# Altium PCB FFC_ToHDR_Pcb.PcbDoc
Units mil, origin at the board's own origin, x right, y up, seen from the top; angles counter-clockwise.
Board outline 555 x 1000 mil, 2 copper layers (Top Layer, Bottom Layer); 5 components, 12 nets, 34 pads, 4 vias.
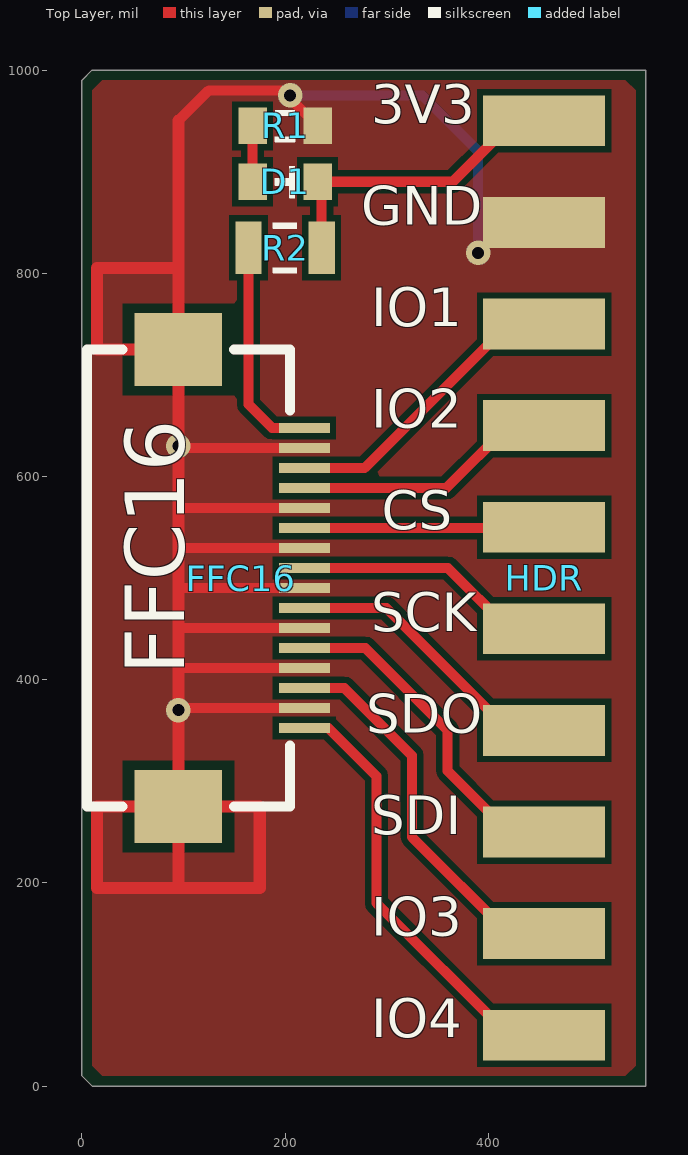
[diagram p0: Top Layer view]
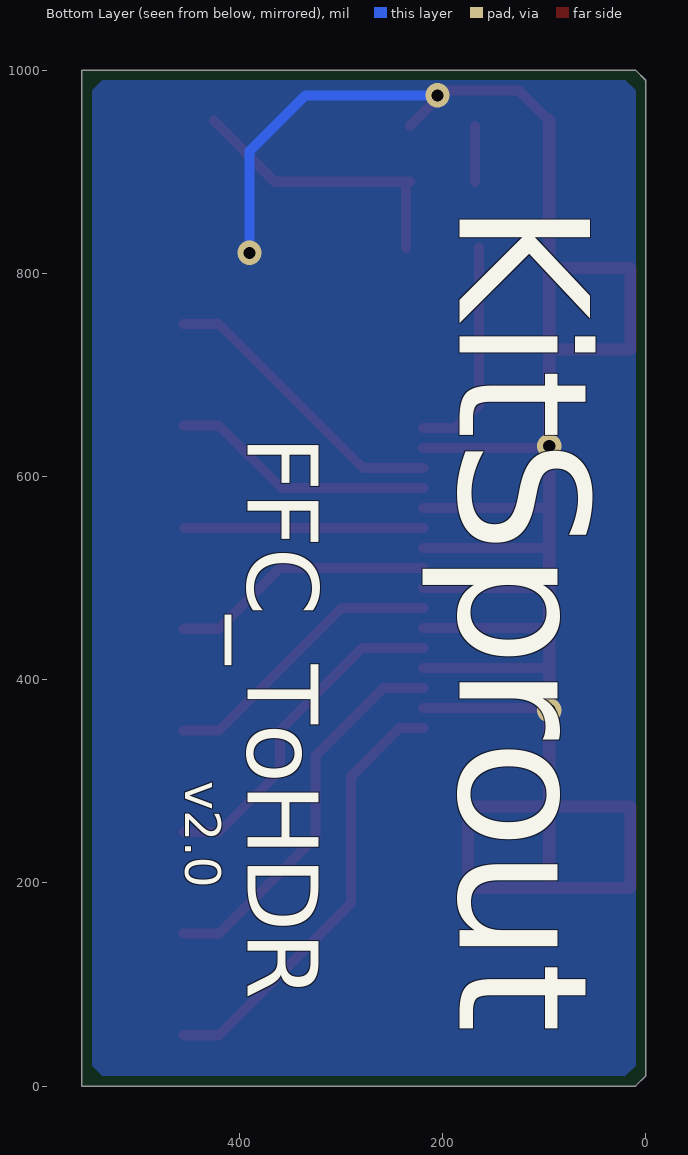
[diagram p1: Bottom Layer view, seen from below]
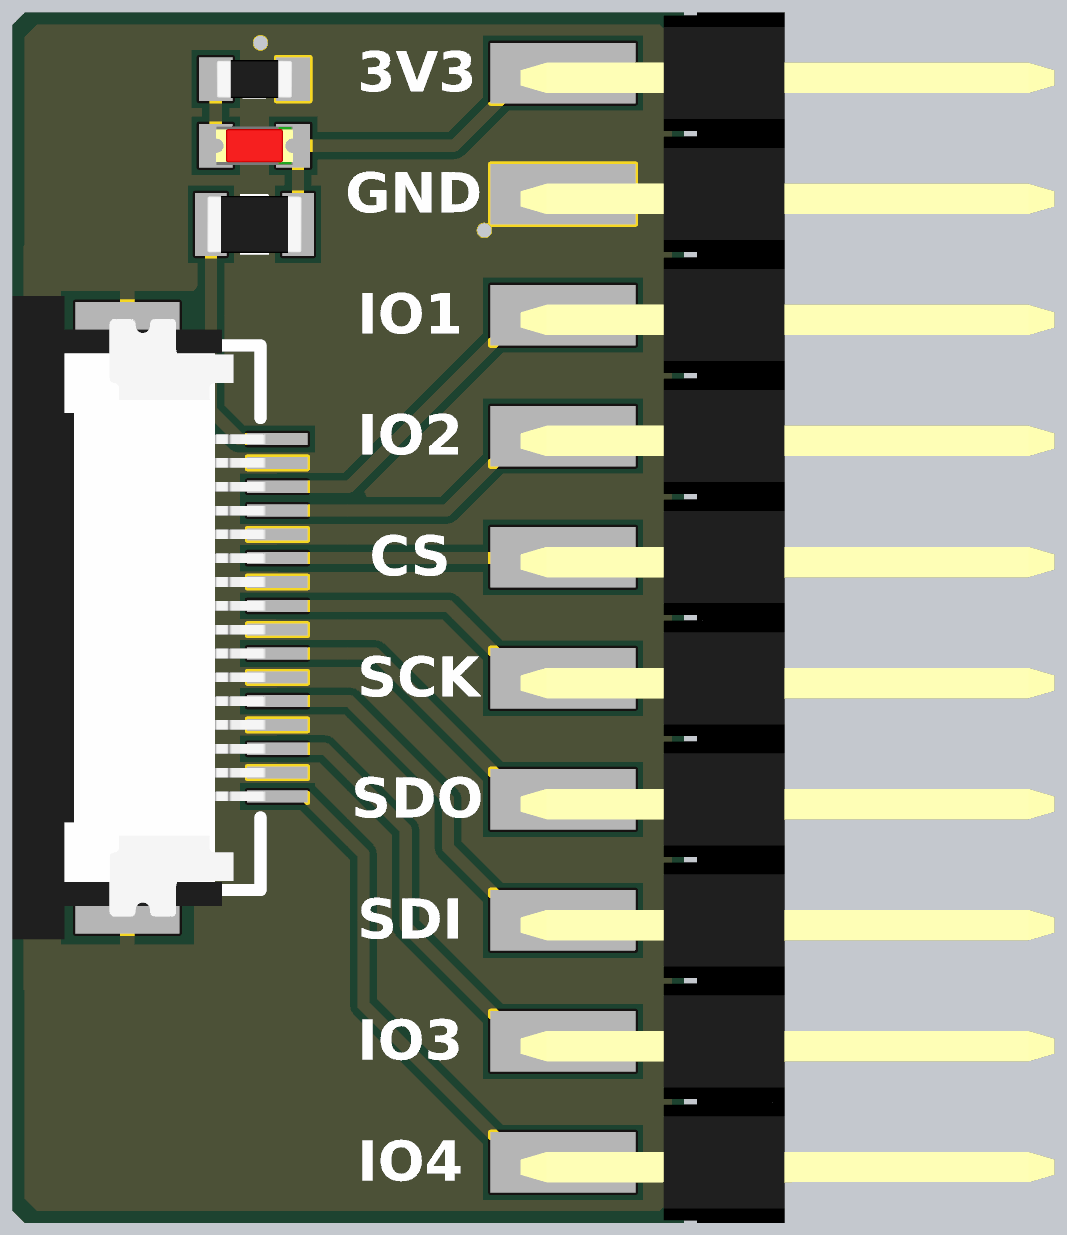
[diagram p2: 3D render of the assembled board from above, using the file's embedded part models]

## Layer stack, top to bottom
Top Solder: solder mask 0.4, Solder Resist, Dk 3.5
Top Layer: signal copper 1.4
Dielectric 1: dielectric 12.6, FR-4, Dk 4.8
Bottom Layer: signal copper 1.4
Bottom Solder: solder mask 0.4, Solder Resist, Dk 3.5

## Board outline
0,10 10,0 555,0 555,1000 10,1000 0,990

## Design rules (kind name [scope] priority, off if disabled: settings)
Clearance ClearancePolygon [InPolygon] p1: gap=6
Clearance [All] p2: gap=6
ComponentClearance [All] p1: gap=0 collisioncheckmode=3 verticalgap=0 showdistances=FALSE
Height [All] p1: minheight=0 maxheight=5000 prefheight=500
HoleSize [All] p1: absolutevalues=TRUE maxlimit=200 minlimit=1 maxpercent=80.000 minpercent=20.000
HoleToHoleClearance [All] p1: gap=6 allowstackedmicrovias=TRUE
MinimumSolderMaskSliver [All] p1: minsoldermaskwidth=4
PolygonConnect [All] p1: connectstyle=Direct reliefconductorwidth=10 reliefentries=4 polygonreliefangle="90 Angle" airgapwidth=10
RoutingVias [All] p1: holewidth=12 width=24 viastyle="Through Hole" minholewidth=12 minwidth=20 maxholewidth=28 maxwidth=50
SilkToSilkClearance [All] p1: silktosilkclearance=0
SilkToSolderMaskClearance [IsPad] p1: minsilkscreentomaskgap=2 clearancetoexposedcopper=TRUE
SolderMaskExpansion [All] p1: expansion=2
Width [All] p1: maxlimit=50 minlimit=6 preferedwidth=10
23 further rules are at their usual default settings.

## Components (designator, comment, footprint, x,y, rotation, side; value= is the part's Value field where it differs from the comment)
D1 "LED_0603" LED_0603_RED 200,890 r180 top
FFC16 "FFC_0.5_16" FFC_0.5_16 155,500 r270 top
HDR "HDR1x10_2.54T" HDR1X10_2.54_180H 455,500 r0 top
R1 "Res_0603" RES_0603 200,945 r180 top
R2 "Res_0805" RES_0805 200,825 r0 top

## Footprints (in the part's own frame and the unit in brackets; to place one, negate y for a bottom-side part, rotate by r counter-clockwise, add the part's x,y. Pads: shape width x height; smd on the part's side, far side on the other; paste and mask are expansions set on the pad)
FFC_0.5_16 [mil]
  rect 72x86 smd: 0(-225,-60) 0(225,-60)
  rect 10x50 smd: 1(-147.64,64) 2(-127.95,64) 3(-108.27,64) 4(-88.58,64) 5(-68.9,64) 6(-49.21,64) 7(-29.53,64) 8(-9.84,64) 9(9.84,64) 10(29.53,64) 11(49.21,64) 12(68.9,64) 13(88.58,64) 14(108.27,64) 15(127.95,64) 16(147.64,64)
  silkscreen extent -225,-150 225,50, body extent -266,-155 266,55, height 82
HDR1X10_2.54_180H [mil]
  rect 120x50 smd: 1(0,450) 2(0,350) 3(0,250) 4(0,150) 5(0,50) 6(0,-50) 7(0,-150) 8(0,-250) 9(0,-350) 10(0,-450)
  body extent -35,-500 406,500, height 61
LED_0603_RED [mil]
  rect 28x36 smd: 1(-32,0) 2(32,0)
  silkscreen extent -10,-16 10,16, body extent -32,-16 32,16, height 24
RES_0603 [mil]
  rect 28x36 smd: 1(-32,0) 2(32,0)
  silkscreen extent -10,-16 10,16, body extent -31,-16 32,16, height 20
RES_0805 [mil]
  rect 26x52 smd: 1(-36,0) 2(36,0)
  silkscreen extent -12,-24 12,24, body extent -39,-24 39,24, height 24

## Part data
D1: "LED"
FFC16: "FFC"
HDR: "Header"
R1 R2: "Resistor"

## Via types
v1: diameter 24, hole 12, Top Layer to Bottom Layer, 4 vias

## Nets (pads, with @x,y where several pads share a name; then routed paths per layer and width w, separated by ;. In a path a pad name is that pad's centre, name@x,y a point inside that pad or via, vN(x,y) a via of type N, cw(c..) or ccw(c..) an arc to the next point about the centre after c; other vN are vias at no path point)
3V3: FFC16.1 R2.1 | length 218.7
  Top Layer w10: R2.1 164,671 187.36,647.64 FFC16.1
GND: FFC16.0 FFC16.2 FFC16.5 FFC16.7 FFC16.9 FFC16.11 FFC16.13 FFC16.15 HDR.2 R1.1 | length 2894.7
  Top Layer w10: v1@95,372.05 FFC16.15 ; 95,411.42 FFC16.13 ; 95,450.79 FFC16.11 ; 95,490.16 FFC16.9 ; 95,529.53 FFC16.7 ; 95,568.9 FFC16.5 ; v1@95,627.95 FFC16.2 ; 95,950 125,980 197,980 R1.1
  Top Layer w12: 95,950 FFC16.0@95,725 ; 95,195 FFC16.0@95,275 ; 95,195 15,195 15,275 FFC16.0@95,275 ; 95,195 175,195 175,275 FFC16.0@95,275 ; FFC16.0@95,275 v1(95,370) 95,372.05 95,411.42 95,450.79 95,490.16 95,529.53 95,568.9 95,627.95 v1(95,630) FFC16.0@95,725 ; FFC16.0@95,725 15,725 15,805 95,805 FFC16.0@95,725
  Bottom Layer w10: v1(205,975) 335,975 390,920 v1(390,820)
NetD1_1: D1.1 HDR.1 R2.2 | length 278.9
  Top Layer w10: D1.1 365,890 HDR.1@425,950 ; R2.2 D1.1@236,886
NetD1_2: D1.2 R1.2 | length 55
  Top Layer w10: D1.2 R1.2
NetFFC16_3: FFC16.3 HDR.3 | length 294.7
  Top Layer w10: FFC16.3 278.27,608.27 420,750 HDR.3
NetFFC16_4: FFC16.4 HDR.4 | length 261.4
  Top Layer w10: FFC16.4 358.58,588.58 420,650 HDR.4
NetFFC16_6: FFC16.6 HDR.5 | length 235.2
  Top Layer w10: FFC16.6 HDR.5@454.21,549.21
NetFFC16_8: FFC16.8 HDR.6 | length 260.8
  Top Layer w10: FFC16.8 360.16,509.84 420,450 HDR.6
NetFFC16_10: FFC16.10 HDR.7 | length 285.9
  Top Layer w10: FFC16.10 299.53,470.47 420,350 HDR.7
NetFFC16_12: FFC16.12 HDR.8 | length 334.4
  Top Layer w10: FFC16.12 278.9,431.1 360,350 360,310 420,250 HDR.8
NetFFC16_14: FFC16.14 HDR.9 | length 383
  Top Layer w10: FFC16.14 258.27,391.73 325,325 325,245 420,150 HDR.9
NetFFC16_16: FFC16.16 HDR.10 | length 434.5
  Top Layer w10: FFC16.16 242.64,352.36 290,305 290,180 420,50 HDR.10

## Polygon pours and split planes (outlines as drawn)
GND on Top Layer "Top Layer-No Net" (solid, remove dead copper, pour order 0): 545,980 535,990 20,990 10,980 10,65 10,20 20,10 535,10 545,20
GND on Bottom Layer "Top Layer-No Net" (solid, remove dead copper, pour order 2): 545,980 535,990 20,990 10,980 10,65 10,20 20,10 535,10 545,20

## Other copper
Top Layer:
  pour cut-out: 40,770 150,770 150,680 40,680
  pour cut-out: 40,320 150,320 150,230 40,230

## Silkscreen, mask and mechanical layers (free items; w line width, h text height)
Top Overlay:
  text "3V3" at 285,935 h65
  text "GND" at 275,835 h65
  text "IO1" at 285,735 h65
  text "IO2" at 285,635 h65
  text "CS" at 295,535 h65
  text "SCK" at 285,435 h65
  text "FFC16" at 120,405 h100 r90
  text "SDO" at 280,335 h65
  text "SDI" at 285,235 h65
  text "IO3" at 285,135 h65
  text "IO4" at 285,35 h65
Bottom Overlay:
  text "KitSprout" at 225,870 h220 r90
  text "FFC_ToHDR" at 415,640 h120 r90
  text "v2.0" at 465,300 h60 r90
Mechanical 1:
  the board outline again, w2